# Altium PCB LPC55S69_MINI [C]2.PCBdoc (part 2 of 2)
Units mil, origin at the board's own origin, x right, y up, seen from the top; angles counter-clockwise.
Board outline 1610.03 x 1685.03 mil, 4 copper layers (Top Layer, PWR, GND, Bottom Layer), stack 39.556 mil thick; 74 components, 63 nets, 581 pads, 0 vias.
Unrouted connection lines stored in the file: 186.
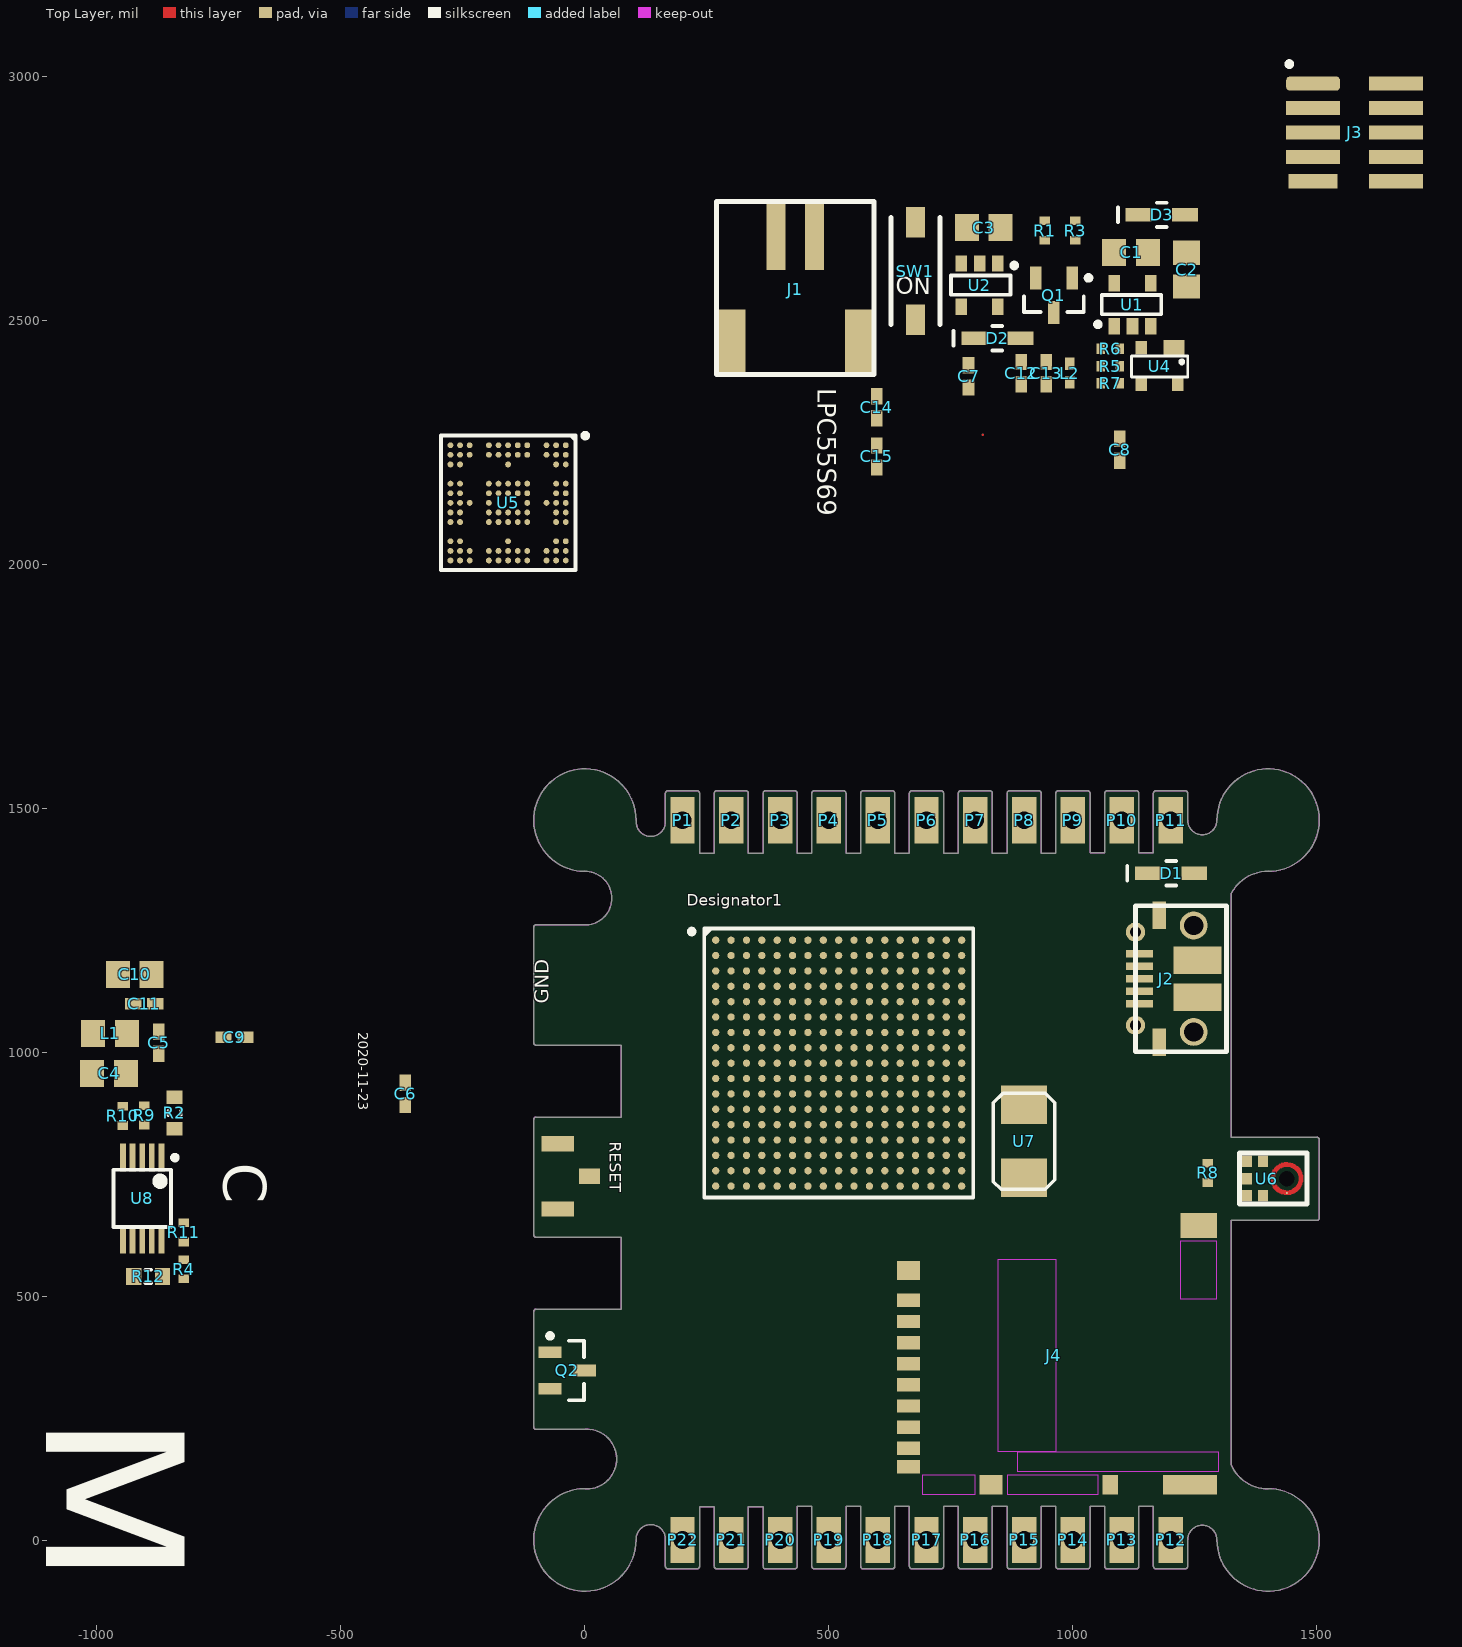
[diagram p0: Top Layer view]

## Part data (continued)
U8: "IC TXRX RS422/485 20MBPS 10MSOP", Manufacturer=Intersil, Operating Temperature="-40°C ~ 85°C", Package / Case="10-TFSOP, 10-MSOP (0.118\", 3.00mm Width)", Supplier Device Package=10-MSOP, Supplier Part Number 1=ISL3176EIUZ-TCT-ND, Voltage - Supply="3 V ~ 3.6 V", Category="Integrated Circuits (ICs)", ComponentLink1Description=http://www.intersil.com/content/dam/intersil/documents/isl3/isl3170e-71e-72e-73e-74e-75e-76e-77e-78e.pdf, ComponentLink1URL=http://www.intersil.com/content/dam/intersil/documents/isl3/isl3170e-71e-72e-73e-74e-75e-76e-77e-78e.pdf, Data Rate=20Mbps, Duplex=Full, Manufacturer Part Number=ISL3176EIUZ-T, Mounting Type="Surface Mount", Number of Drivers/Receivers=1/1, Packaging="Cut Tape (CT)", Part Status=Active, Pricing 1="1=1.79, 10=1.61, 100=1.2944, 500=1.06348, 1000=0.88117 (USD)", Protocol="RS422, RS485", RoHS="RoHS Compliant", Stock 1=9164, Supplier 1=Digi-Key, Type=Transceiver

## Nets (pads, with @x,y where several pads share a name; then routed paths per layer and width w, separated by ;. In a path a pad name is that pad's centre, name@x,y a point inside that pad or via, vN(x,y) a via of type N, cw(c..) or ccw(c..) an arc to the next point about the centre after c; other vN are vias at no path point)
+3.3v: C4.2 C5.2 C6.2 C7.2 C8.2 C9.2 J3.1 J4.4 L2.1 P9.1 R4.2 R8.2 R10.1 R11.1 U2.5 U3.3 U3.4 U5.A3 U5.A5 U5.A9 U5.A13 U5.M1 U5.M13 U5.N7 U5.N13 U6.5 U8.10
+5v_USB: D3.1 J2.1 P10.1 R7.2 U4.4
+VIN: D1.1 P11.1
BATT: C2.2 J1.2 P1.1 Q1.3 U1.3
BATT_STAT: U1.1 U5.A8
BTN2: BTN2.2 U5.H13
BTN3: BTN3.2 U5.M8
DE: R10.2 U5.L12 U8.3
DM: J2.2 R5.1 U4.3
DM_MCU: R5.2 U5.N6
DP: J2.3 R6.1 U4.2
DP_MCU: R6.2 U5.M6
FC1_SCL: P12.1 U5.C13
FC1_SDA: P13.1 U5.C12
GND: BTN1.1 BTN1.S BTN2.1 BTN2.S BTN3.1 BTN3.S C1.1 C2.1 C3.1 C4.1 C5.1 C6.1 C7.1 C8.1 C9.1 C10.1 C11.1 C12.2 C13.1 C14.1 C15.1 J1.1 J2.4 J2.5 J2.MOUNT J3.3 J3.5 J3.9 J4.6 J4.CDA J4.M P2.1 P16.1 Q2.3 R1.2 R3.1 R9.1 RESET.1 RESET.S U1.2 U2.2 U3.1 U3.5 U3.6 U3.12 U4.1 U5.B1 U5.B5 U5.B9 U5.B13 U5.H1 U5.H2 U5.M11 U5.M12 U5.N1 U5.N5 U5.N12 U6.2 U6.3 U8.5
ISP0: BTN1.2 P17.1 R4.1 U5.A7
LCD_BL: Q2.1 U5.J9
LCD_CMD_DATA: U3.7 U5.G13
LCD_RST: U3.11 U5.F13
LCD_SPI_CS: U3.8 U5.G11
LCD_SPI_MOSI: U3.10 U5.H12
LCD_SPI_SCK: U3.9 U5.G12
MIC_BCLK: U5.B7 U6.4
MIC_DATA: U5.E8 U5.F8 U6.6
MIC_WS: U5.B11 U6.1
NetC1_2: C1.2 D1.2 D2.1 D3.2 Q1.1 R1.1 U1.4
NetC10_2: C10.2 C11.2 L1.1 U5.M9 U5.N9
NetC12_1: C12.1 C13.2 L2.2 U5.G1 U5.G2
NetC14_2: C14.2 U5.N3 U7.2
NetC15_2: C15.2 U5.M3 U7.1
NetD2_2: D2.2 Q1.2 SW1.1
NetL1_2: L1.2 U5.N11
NetQ2_2: Q2.2 R2.1
NetR2_2: R2.2 U3.2
NetR3_2: R3.2 U1.5
NetR7_1: R7.1 U5.N8
PIO0_15: P5.1 U5.L2
PIO0_16: P6.1 U5.J2
PIO0_21: P14.1 U5.A12
PIO0_23: P22.1 U5.J1
PIO0_27: P3.1 U5.N2
PIO0_29: U5.H8 U8.1
PIO0_30: U5.E5 U8.4
PIO0_31: P4.1 U5.L1
PIO1_4: P7.1 U5.B2
PIO1_26: P15.1 U5.E13
PWR_SWITCH: C3.2 P8.1 SW1.2 U2.1 U2.3
RE: R9.2 U5.L13 U8.2
RST: J3.10 R8.1 RESET.2 U5.J6
RX_N: P19.1 R12.2 U8.8
RX_P: P18.1 R12.1 U8.9
SD_CD: J4.CDB R11.2 U5.B3
SD_CLK: J4.5 U5.A6
SD_CMD: J4.3 U5.C7
SD_D0: J4.7 U5.E12
SD_D1: J4.8 U5.A11
SD_D2: J4.1 U5.M5
SD_D3: J4.2 U5.H5
SWD_CLK: J3.4 U5.F1
SWD_IO: J3.2 U5.E2
SWO: J3.6 U5.F2
TX_N: P21.1 U8.6
TX_P: P20.1 U8.7
pads on no net: Designator1.A1 Designator1.A2 Designator1.A3 Designator1.A4 Designator1.A5 Designator1.A6 Designator1.A7 Designator1.A8 Designator1.A9 Designator1.A10 Designator1.A11 Designator1.A12 Designator1.A13 Designator1.A14 Designator1.A15 Designator1.A16 Designator1.A17 Designator1.B1 Designator1.B2 Designator1.B3 Designator1.B4 Designator1.B5 Designator1.B6 Designator1.B7 Designator1.B8 Designator1.B9 Designator1.B10 Designator1.B11 Designator1.B12 Designator1.B13 Designator1.B14 Designator1.B15 Designator1.B16 Designator1.B17 Designator1.C1 Designator1.C2 Designator1.C3 Designator1.C4 Designator1.C5 Designator1.C6 Designator1.C7 Designator1.C8 Designator1.C9 Designator1.C10 Designator1.C11 Designator1.C12 Designator1.C13 Designator1.C14 Designator1.C15 Designator1.C16 Designator1.C17 Designator1.D1 Designator1.D2 Designator1.D3 Designator1.D4 Designator1.D5 Designator1.D6 Designator1.D7 Designator1.D8 Designator1.D9 Designator1.D10 Designator1.D11 Designator1.D12 Designator1.D13 Designator1.D14 Designator1.D15 Designator1.D16 Designator1.D17 Designator1.E1 Designator1.E2 Designator1.E3 Designator1.E4 Designator1.E5 Designator1.E6 Designator1.E7 Designator1.E8 Designator1.E9 Designator1.E10 Designator1.E11 Designator1.E12 Designator1.E13 Designator1.E14 Designator1.E15 Designator1.E16 Designator1.E17 Designator1.F1 Designator1.F2 Designator1.F3 Designator1.F4 Designator1.F5 Designator1.F6 Designator1.F7 Designator1.F8 Designator1.F9 Designator1.F10 Designator1.F11 Designator1.F12 Designator1.F13 Designator1.F14 Designator1.F15 Designator1.F16 Designator1.F17 Designator1.G1 Designator1.G2 Designator1.G3 Designator1.G4 Designator1.G5 Designator1.G6 Designator1.G7 Designator1.G8 Designator1.G9 Designator1.G10 Designator1.G11 Designator1.G12 Designator1.G13 Designator1.G14 Designator1.G15 Designator1.G16 Designator1.G17 Designator1.H1 Designator1.H2 Designator1.H3 Designator1.H4 Designator1.H5 Designator1.H6 Designator1.H7 Designator1.H8 Designator1.H9 Designator1.H10 Designator1.H11 Designator1.H12 Designator1.H13 Designator1.H14 Designator1.H15 Designator1.H16 Designator1.H17 Designator1.J1 Designator1.J2 Designator1.J3 Designator1.J4 Designator1.J5 Designator1.J6 Designator1.J7 Designator1.J8 Designator1.J9 Designator1.J10 Designator1.J11 Designator1.J12 Designator1.J13 Designator1.J14 Designator1.J15 Designator1.J16 Designator1.J17 Designator1.K1 Designator1.K2 Designator1.K3 Designator1.K4 Designator1.K5 Designator1.K6 Designator1.K7 Designator1.K8 Designator1.K9 Designator1.K10 Designator1.K11 Designator1.K12 Designator1.K13 Designator1.K14 Designator1.K15 Designator1.K16 Designator1.K17 Designator1.L1 Designator1.L2 Designator1.L3 Designator1.L4 Designator1.L5 Designator1.L6 Designator1.L7 Designator1.L8 Designator1.L9 Designator1.L10 Designator1.L11 Designator1.L12 Designator1.L13 Designator1.L14 Designator1.L15 Designator1.L16 Designator1.L17 Designator1.M1 Designator1.M2 Designator1.M3 Designator1.M4 Designator1.M5 Designator1.M6 Designator1.M7 Designator1.M8 Designator1.M9 Designator1.M10 Designator1.M11 Designator1.M12 Designator1.M13 Designator1.M14 Designator1.M15 Designator1.M16 Designator1.M17 Designator1.N1 Designator1.N2 Designator1.N3 Designator1.N4 Designator1.N5 Designator1.N6 Designator1.N7 Designator1.N8 Designator1.N9 Designator1.N10 Designator1.N11 Designator1.N12 Designator1.N13 Designator1.N14 Designator1.N15 Designator1.N16 Designator1.N17 Designator1.P1 Designator1.P2 Designator1.P3 Designator1.P4 Designator1.P5 Designator1.P6 Designator1.P7 Designator1.P8 Designator1.P9 Designator1.P10 Designator1.P11 Designator1.P12 Designator1.P13 Designator1.P14 Designator1.P15 Designator1.P16 Designator1.P17 Designator1.R1 Designator1.R2 Designator1.R3 Designator1.R4 Designator1.R5 Designator1.R6 Designator1.R7 Designator1.R8 Designator1.R9 Designator1.R10 Designator1.R11 Designator1.R12 Designator1.R13 Designator1.R14 Designator1.R15 Designator1.R16 Designator1.R17 Designator1.T1 Designator1.T2 Designator1.T3 Designator1.T4 Designator1.T5 Designator1.T6 Designator1.T7 Designator1.T8 Designator1.T9 Designator1.T10 Designator1.T11 Designator1.T12 Designator1.T13 Designator1.T14 Designator1.T15 Designator1.T16 Designator1.T17 Designator1.U1 Designator1.U2 Designator1.U3 Designator1.U4 Designator1.U5 Designator1.U6 Designator1.U7 Designator1.U8 Designator1.U9 Designator1.U10 Designator1.U11 Designator1.U12 Designator1.U13 Designator1.U14 Designator1.U15 Designator1.U16 Designator1.U17 J1.M1 J1.M2 J3.7 J3.8 J3.A U2.4 U5.A1 U5.A2 U5.B6 U5.B8 U5.B12 U5.C1 U5.C2 U5.E1 U5.E6 U5.E7 U5.E9 U5.F5 U5.F6 U5.F9 U5.F12 U5.G3 U5.G5 U5.G6 U5.G8 U5.G9 U5.H6 U5.H9 U5.J5 U5.J7 U5.J8 U5.J12 U5.J13 U5.L7 U5.M2 U5.M7 U6.PORT_HOLE
copper on no net: | length 0.6
  Top Layer w5: 815.26,2266.15 815.26,2266.74

## Polygon pours and split planes (outlines as drawn)
+3.3v on PWR "+3.3V_L02_P000" (solid, remove dead copper, pour order 0): -269,1730 -269,-444 1899,-444 1899,1730
GND on GND "GND_L03_P001" (solid, remove dead copper, pour order 1): -300,1807 1790,1807 1790,-205 -300,-205

## Keep-outs
Keep-Out Layer:
  lines w0.1: 0.03,1262.21 ccw(c0,1257.2) 0,1262.21 -100,1262.21 ccw(c-100,1257.2) -105.01,1257.2 -105.01,1020.98 ccw(c-100,1020.98) -100,1015.96 74.04,1015.96 74.04,868.51 -100,868.51 ccw(c-100,863.5) -105.01,863.5 -105.01,627.28 ccw(c-100,627.28) -100,622.26 74.04,622.26 74.04,474.81 -100,474.81 ccw(c-100,469.8) -105.01,469.8 -105.01,233.57 ccw(c-100,233.57) -100,228.56 0,228.56 ccw(c0,233.57) 0.32,228.57 ; 0.03,1262.21 ccw(c0.31,1317.1) 55.2,1317.1 ccw(c0.31,1317.1) 0.03,1371.99 ; 0.03,1262.21 0.03,1262.21 ; 0.03,1371.99 cw(c0,1377) 0,1371.99 cw(c0,1477) 105.01,1477 cw(c100,1477) 104.99,1476.51 ; 0.03,1371.99 0.03,1371.99 ; 0.35,107 ccw(c0,102) 0,107.01 ccw(c0,2) 105.01,2 ccw(c100,2) 105.01,2.2 ; 0.32,107 ccw(c4.21,167.79) 0.35,107 ; 0.35,107 ccw(c4.21,167.79) 65.12,167.79 ccw(c4.21,167.79) 0.32,228.57 ; 0.32,107 0.35,107 ; 0.32,228.57 0.32,228.57 ; 105.01,2.2 cw(c135,3.43) 165.01,3.43 cw(c135,3.43) 164.99,2.2 ; 105.01,2.2 105.01,2.2 ; 104.99,1476.51 cw(c135,1473.79) 104.99,1476.54 104.99,1476.51 ; 104.99,1476.51 ccw(c135,1473.79) 165.13,1473.79 ccw(c135,1473.79) 165.01,1476.51 ; 164.99,2.2 ccw(c170,2) 164.99,2 164.99,-52.09 ccw(c170,-52.09) 170,-57.11 230,-57.11 ccw(c230,-52.09) 235.01,-52.09 235.02,70.29 264.99,70.29 264.99,-52.09 ccw(c270,-52.09) 270,-57.11 330,-57.11 ccw(c330,-52.09) 335.01,-52.09 335.02,70.29 364.99,70.29 364.99,-52.09 ccw(c370,-52.09) 370,-57.11 430,-57.11 ccw(c430,-52.09) 435.01,-52.09 435.02,71.16 464.99,71.16 464.99,-52.09 ccw(c470,-52.09) 470,-57.11 530,-57.11 ccw(c530,-52.09) 535.01,-52.09 535.02,71.16 564.99,71.16 564.99,-52.09 ccw(c570,-52.09) 570,-57.11 630,-57.11 ccw(c630,-52.09) 635.01,-52.09 635.02,71.16 664.99,71.16 664.99,-52.09 ccw(c670,-52.09) 670,-57.11 730,-57.11 ccw(c730,-52.09) 735.01,-52.09 735.02,71.16 764.99,71.16 764.99,-52.09 ccw(c770,-52.09) 770,-57.11 830,-57.11 ccw(c830,-52.09) 835.01,-52.09 835.02,71.16 864.99,71.16 864.99,-52.09 ccw(c870,-52.09) 870,-57.11 930,-57.11 ccw(c930,-52.09) 935.01,-52.09 935.02,71.16 964.99,71.16 964.99,-52.09 ccw(c970,-52.09) 970,-57.11 1030,-57.11 ccw(c1030,-52.09) 1035.01,-52.09 1035.02,71.16 1064.99,71.16 1064.99,-52.09 ccw(c1070,-52.09) 1070,-57.11 1130,-57.11 ccw(c1130,-52.09) 1135.01,-52.09 1135.02,71.16 1164.99,71.16 1164.99,-52.09 ccw(c1170,-52.09) 1170,-57.11 1230,-57.11 ccw(c1230,-52.09) 1235.01,-52.09 1235.02,2 cw(c1265,2) 1294.99,2 ccw(c1400,2) 1505.01,2 ccw(c1400,2) 1400,107.01 ccw(c1400,102) 1399.88,107.01 ; 164.99,2.2 164.99,2.2 ; 165.01,1476.51 cw(c170,1477) 164.99,1477 164.99,1532 cw(c170,1532) 170,1537.01 230,1537.01 cw(c230,1532) 235.01,1532 235.02,1408.75 264.99,1408.75 264.99,1532 cw(c270,1532) 270,1537.01 330,1537.01 cw(c330,1532) 335.01,1532 335.02,1408.75 364.99,1408.75 364.99,1532 cw(c370,1532) 370,1537.01 430,1537.01 cw(c430,1532) 435.01,1532 435.02,1408.75 464.99,1408.75 464.99,1532 cw(c470,1532) 470,1537.01 530,1537.01 cw(c530,1532) 535.01,1532 535.02,1408.75 564.99,1408.75 564.99,1532 cw(c570,1532) 570,1537.01 630,1537.01 cw(c630,1532) 635.01,1532 635.02,1408.75 664.99,1408.75 664.99,1532 cw(c670,1532) 670,1537.01 730,1537.01 cw(c730,1532) 735.01,1532 735.02,1408.75 764.99,1408.75 764.99,1532 cw(c770,1532) 770,1537.01 830,1537.01 cw(c830,1532) 835.01,1532 835.02,1408.75 864.99,1408.75 864.99,1532 cw(c870,1532) 870,1537.01 930,1537.01 cw(c930,1532) 935.01,1532 935.02,1408.75 964.99,1408.75 964.99,1532 cw(c970,1532) 970,1537.01 1030,1537.01 cw(c1030,1532) 1035.01,1532 1035.02,1409.61 1064.99,1409.61 1064.99,1532 cw(c1070,1532) 1070,1537.01 1130,1537.01 cw(c1130,1532) 1135.01,1532 1135.02,1409.61 1164.99,1409.61 1164.99,1532 cw(c1170,1532) 1170,1537.01 1230,1537.01 cw(c1230,1532) 1235.01,1532 1235.02,1477 ccw(c1265,1477) 1294.99,1477 cw(c1400,1477) 1505.01,1477 cw(c1400,1477) 1400,1371.99 ; 165.01,1476.51 165.01,1476.51 ; 1399.88,107.01 cw(c1398.53,187.93) 1324.23,155.85 1324.23,656.99 1500,656.99 ccw(c1500,662) 1505.01,662 1505.02,822 ccw(c1500,822) 1500,827.01 1324.23,827.01 1324.23,1326.81 cw(c1400.19,1285.54) 1399.98,1371.98 ; 1399.88,107.01 ccw(c1398.53,187.93) 1399.91,107.01 ; 1399.88,107.01 1399.91,107.01 ; 1399.88,107.01 1399.88,107.01 ; 1400.01,1371.99 ccw(c1400.19,1285.54) 1399.98,1371.98 ; 1400,1371.99 1400.01,1371.99
  lines w1: 0.03,1262.21 ccw(c0,1257.2) 0,1262.21 -100,1262.21 ccw(c-100,1257.2) -105.01,1257.2 -105.01,1020.98 ccw(c-100,1020.98) -100,1015.96 74.04,1015.96 74.04,868.51 -100,868.51 ccw(c-100,863.5) -105.01,863.5 -105.01,627.28 ccw(c-100,627.28) -100,622.26 74.04,622.26 74.04,474.81 -100,474.81 ccw(c-100,469.8) -105.01,469.8 -105.01,233.57 ccw(c-100,233.57) -100,228.56 0,228.56 ccw(c0,233.57) 0.32,228.57 ; 0.03,1262.21 ccw(c0.31,1317.1) 55.2,1317.1 ccw(c0.31,1317.1) 0.03,1371.99 ; 0.03,1262.21 0.03,1262.21 ; 0.03,1371.99 cw(c0,1377) 0,1371.99 cw(c0,1477) 105.01,1477 cw(c100,1477) 104.99,1476.51 ; 0.03,1371.99 0.03,1371.99 ; 0.35,107 ccw(c0,102) 0,107.01 ccw(c0,2) 105.01,2 ccw(c100,2) 105.01,2.2 ; 0.32,107 ccw(c4.21,167.79) 0.35,107 ; 0.35,107 ccw(c4.21,167.79) 65.12,167.79 ccw(c4.21,167.79) 0.32,228.57 ; 0.32,107 0.35,107 ; 0.32,228.57 0.32,228.57 ; 105.01,2.2 cw(c135,3.43) 165.01,3.43 cw(c135,3.43) 164.99,2.2 ; 105.01,2.2 105.01,2.2 ; 104.99,1476.51 cw(c135,1473.79) 104.99,1476.54 104.99,1476.51 ; 104.99,1476.51 ccw(c135,1473.79) 165.13,1473.79 ccw(c135,1473.79) 165.01,1476.51 ; 164.99,2.2 ccw(c170,2) 164.99,2 164.99,-52.09 ccw(c170,-52.09) 170,-57.11 230,-57.11 ccw(c230,-52.09) 235.01,-52.09 235.02,70.29 264.99,70.29 264.99,-52.09 ccw(c270,-52.09) 270,-57.11 330,-57.11 ccw(c330,-52.09) 335.01,-52.09 335.02,70.29 364.99,70.29 364.99,-52.09 ccw(c370,-52.09) 370,-57.11 430,-57.11 ccw(c430,-52.09) 435.01,-52.09 435.02,71.16 464.99,71.16 464.99,-52.09 ccw(c470,-52.09) 470,-57.11 530,-57.11 ccw(c530,-52.09) 535.01,-52.09 535.02,71.16 564.99,71.16 564.99,-52.09 ccw(c570,-52.09) 570,-57.11 630,-57.11 ccw(c630,-52.09) 635.01,-52.09 635.02,71.16 664.99,71.16 664.99,-52.09 ccw(c670,-52.09) 670,-57.11 730,-57.11 ccw(c730,-52.09) 735.01,-52.09 735.02,71.16 764.99,71.16 764.99,-52.09 ccw(c770,-52.09) 770,-57.11 830,-57.11 ccw(c830,-52.09) 835.01,-52.09 835.02,71.16 864.99,71.16 864.99,-52.09 ccw(c870,-52.09) 870,-57.11 930,-57.11 ccw(c930,-52.09) 935.01,-52.09 935.02,71.16 964.99,71.16 964.99,-52.09 ccw(c970,-52.09) 970,-57.11 1030,-57.11 ccw(c1030,-52.09) 1035.01,-52.09 1035.02,71.16 1064.99,71.16 1064.99,-52.09 ccw(c1070,-52.09) 1070,-57.11 1130,-57.11 ccw(c1130,-52.09) 1135.01,-52.09 1135.02,71.16 1164.99,71.16 1164.99,-52.09 ccw(c1170,-52.09) 1170,-57.11 1230,-57.11 ccw(c1230,-52.09) 1235.01,-52.09 1235.02,2 cw(c1265,2) 1294.99,2 ccw(c1400,2) 1505.01,2 ccw(c1400,2) 1400,107.01 ccw(c1400,102) 1399.88,107.01 ; 164.99,2.2 164.99,2.2 ; 165.01,1476.51 cw(c170,1477) 164.99,1477 164.99,1532 cw(c170,1532) 170,1537.01 230,1537.01 cw(c230,1532) 235.01,1532 235.02,1408.75 264.99,1408.75 264.99,1532 cw(c270,1532) 270,1537.01 330,1537.01 cw(c330,1532) 335.01,1532 335.02,1408.75 364.99,1408.75 364.99,1532 cw(c370,1532) 370,1537.01 430,1537.01 cw(c430,1532) 435.01,1532 435.02,1408.75 464.99,1408.75 464.99,1532 cw(c470,1532) 470,1537.01 530,1537.01 cw(c530,1532) 535.01,1532 535.02,1408.75 564.99,1408.75 564.99,1532 cw(c570,1532) 570,1537.01 630,1537.01 cw(c630,1532) 635.01,1532 635.02,1408.75 664.99,1408.75 664.99,1532 cw(c670,1532) 670,1537.01 730,1537.01 cw(c730,1532) 735.01,1532 735.02,1408.75 764.99,1408.75 764.99,1532 cw(c770,1532) 770,1537.01 830,1537.01 cw(c830,1532) 835.01,1532 835.02,1408.75 864.99,1408.75 864.99,1532 cw(c870,1532) 870,1537.01 930,1537.01 cw(c930,1532) 935.01,1532 935.02,1408.75 964.99,1408.75 964.99,1532 cw(c970,1532) 970,1537.01 1030,1537.01 cw(c1030,1532) 1035.01,1532 1035.02,1409.61 1064.99,1409.61 1064.99,1532 cw(c1070,1532) 1070,1537.01 1130,1537.01 cw(c1130,1532) 1135.01,1532 1135.02,1409.61 1164.99,1409.61 1164.99,1532 cw(c1170,1532) 1170,1537.01 1230,1537.01 cw(c1230,1532) 1235.01,1532 1235.02,1477 ccw(c1265,1477) 1294.99,1477 cw(c1400,1477) 1505.01,1477 cw(c1400,1477) 1400,1371.99 ; 165.01,1476.51 165.01,1476.51 ; 1399.88,107.01 cw(c1398.53,187.93) 1324.23,155.85 1324.23,656.99 1500,656.99 ccw(c1500,662) 1505.01,662 1505.02,822 ccw(c1500,822) 1500,827.01 1324.23,827.01 1324.23,1326.81 cw(c1400.19,1285.54) 1399.98,1371.98 ; 1399.88,107.01 ccw(c1398.53,187.93) 1399.91,107.01 ; 1399.88,107.01 1399.91,107.01 ; 1399.88,107.01 1399.88,107.01 ; 1400.01,1371.99 ccw(c1400.19,1285.54) 1399.98,1371.98 ; 1400,1371.99 1400.01,1371.99

## Silkscreen, mask and mechanical layers (free items; w line width, h text height)
Top Overlay:
  text "LPC55S69" at 464,2362 h65 r270
  text "Mini Monkey" at -1270,1425 h55 r270
  text "GND" at -64,1101 h50 r90
  text "2020-11-23" at -472,1042 h35 r270
  text "C" at -769,775 h150 r270
  text "M" at -1226,262 h550 r270
Bottom Overlay:
  lines w15: 1344,708 1413,708 ; 1344,779 1415,779 ; 1469,677 cw(c1469,742) 1469,807 1469,677
  text "11" at 1268,1412 h40
  text "1" at 169,1411 h40
  text "1" at 550,343 h75
  text "22" at 154,40 h40
  text "12" at 1285,40 h40
[8] Board Outline:
  lines w1: 370,75.31 330,75.31 330,-52.09 270,-52.09 270,75.31 230,75.31 230,-52.09 170,-52.09 170,2 ccw(c135,3.43) 100,2 cw(c0,2) 0,102 ccw(c4.21,167.79) 0,233.57 -100,233.57 -100,469.8 79.06,469.8 79.06,627.28 -100,627.28 -100,863.5 79.06,863.5 79.06,1020.98 -100,1020.98 -100,1257.2 0,1257.2 ccw(c0.31,1317.1) 0,1377 cw(c0,1477) 100,1477 ccw(c135,1473.79) 170,1477 170,1532 230,1532 230,1403.73 270,1403.73 270,1532 330,1532 330,1403.73 370,1403.73 370,1532 430,1532 430,1403.73 470,1403.73 470,1532 530,1532 530,1403.73 570,1403.73 ; 370,76.17 370,-52.09 430,-52.09 430,76.17 470,76.17 470,-52.09 530,-52.09 530,76.17 570,76.17 570,-52.09 630,-52.09 630,76.17 670,76.17 670,-137.54 730,-137.54 730,76.17 770,76.17 770,-52.09 830,-52.09 830,72.33 ; 570,1407.57 570,1532 630,1532 630,1403.73 670,1403.73 670,1532 730,1532 730,1403.73 770,1403.73 770,1532 830,1532 830,1403.73 870,1403.73 870,1532 930,1532 930,1403.73 970,1403.73 970,1532 1030,1532 1030,1403.73 ; 830,76.17 870,76.17 870,-52.09 930,-52.09 930,76.17 970,76.17 970,-52.09 1030,-52.09 1030,76.17 1070,76.17 1070,-52.09 1130,-52.09 1130,76.17 1170,76.17 1170,-52.09 1230,-52.09 1230,2 cw(c1265,2) 1300,2 ccw(c1400,2) 1400,102 cw(c1398.53,187.93) 1319.21,154.83 1319.21,662 1500,662 1500,822 1319.21,822 1319.21,1328.06 cw(c1400.19,1285.54) 1400,1377 ccw(c1400,1477) 1300,1477 cw(c1265,1477) 1230,1477 1230,1532 1170,1532 1170,1404.6 1130,1404.6 1130,1532 1070,1532 1070,1404.6 1030,1404.6 ; 1230,76.17 ccw(c1230.08,76.17) 1230.08,76.09

## Text inside footprints (layer, text, board x,y; h text height)
J4: [1] 3D Body Top "LOCK" at 1362.91,96.33 h9.84 r90; [1] 3D Body Top "OVERSTROKE" at 1332.4,38.26 h9.84 r90; [1] 3D Body Top "CARD EJECT" at 1520.39,42.2 h9.84 r90
SW1: Top Overlay "ON" at 637.32,2542.7 h59.06